# Altium PCB PCB1.PcbDoc
Units mm, origin at the board's own origin, x right, y up, seen from the top; angles counter-clockwise.
Board outline 40.75 x 21 mm, 2 copper layers (Top Layer, Bottom Layer), stack 1.071 mm thick; 24 components, 11 nets, 49 pads, 4 vias.
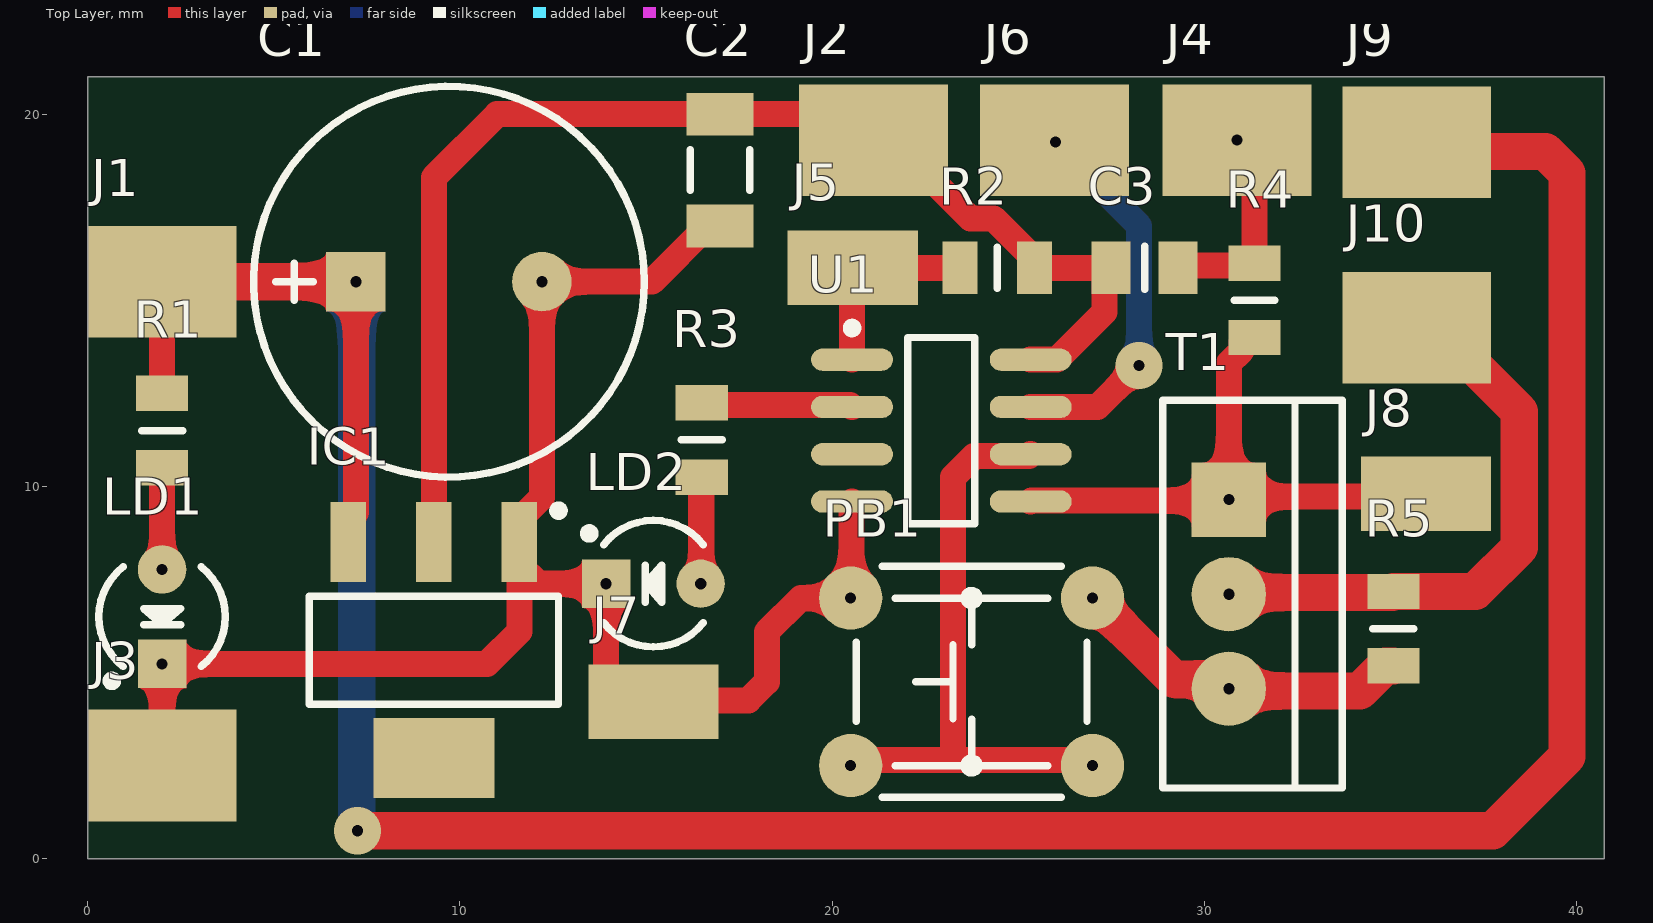
[diagram p0: Top Layer view]
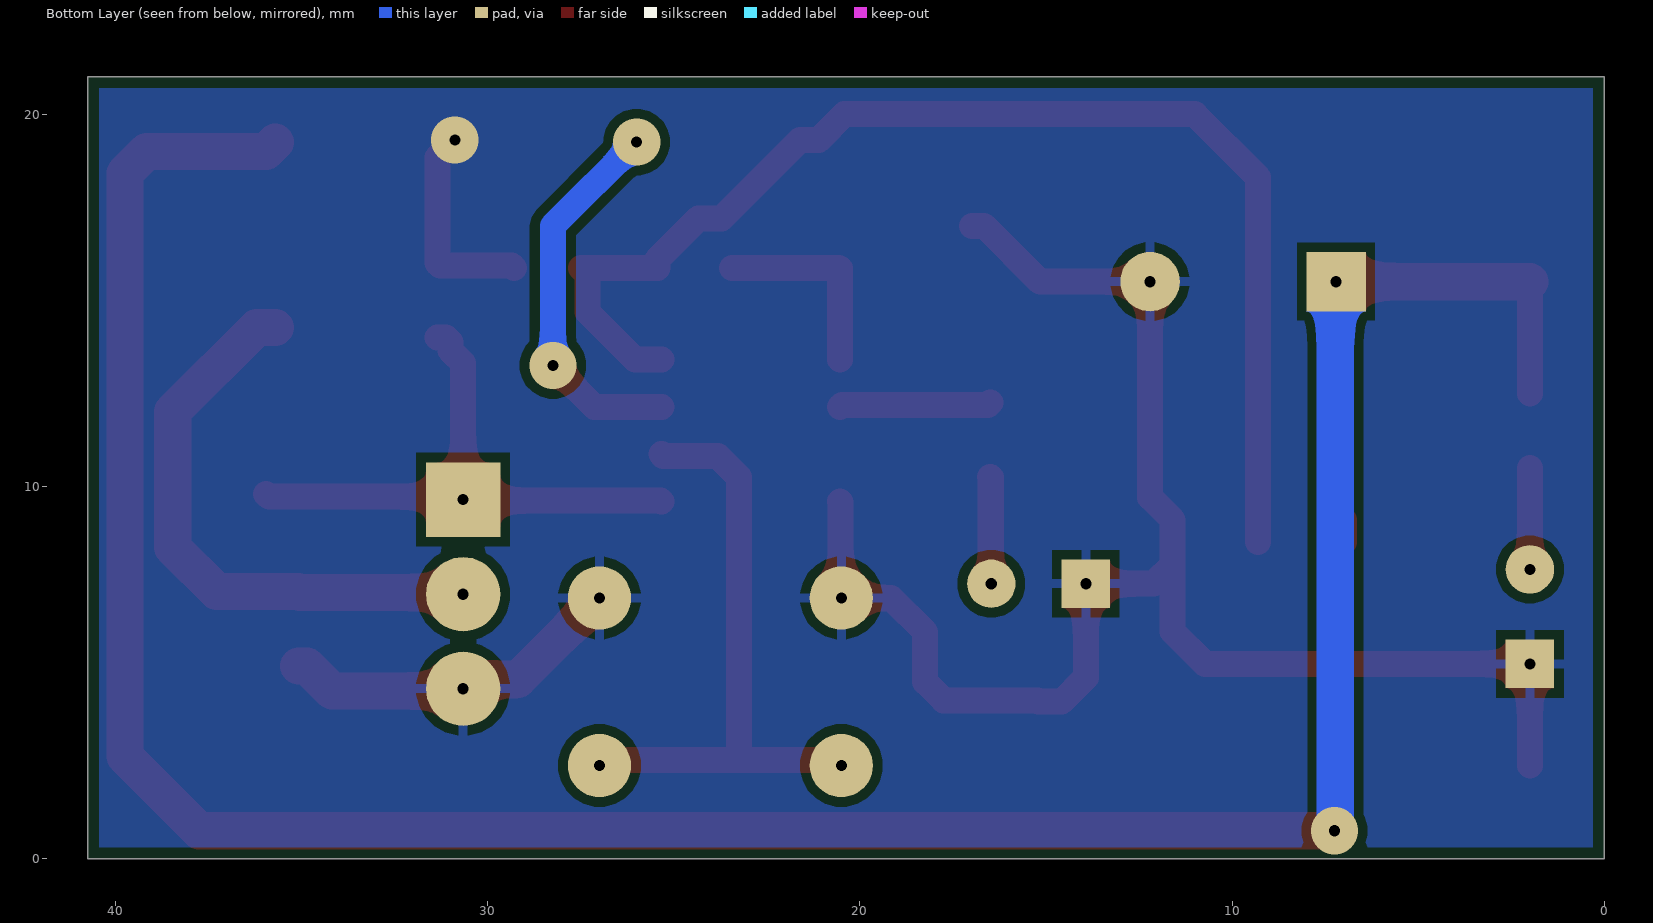
[diagram p1: Bottom Layer view, seen from below]
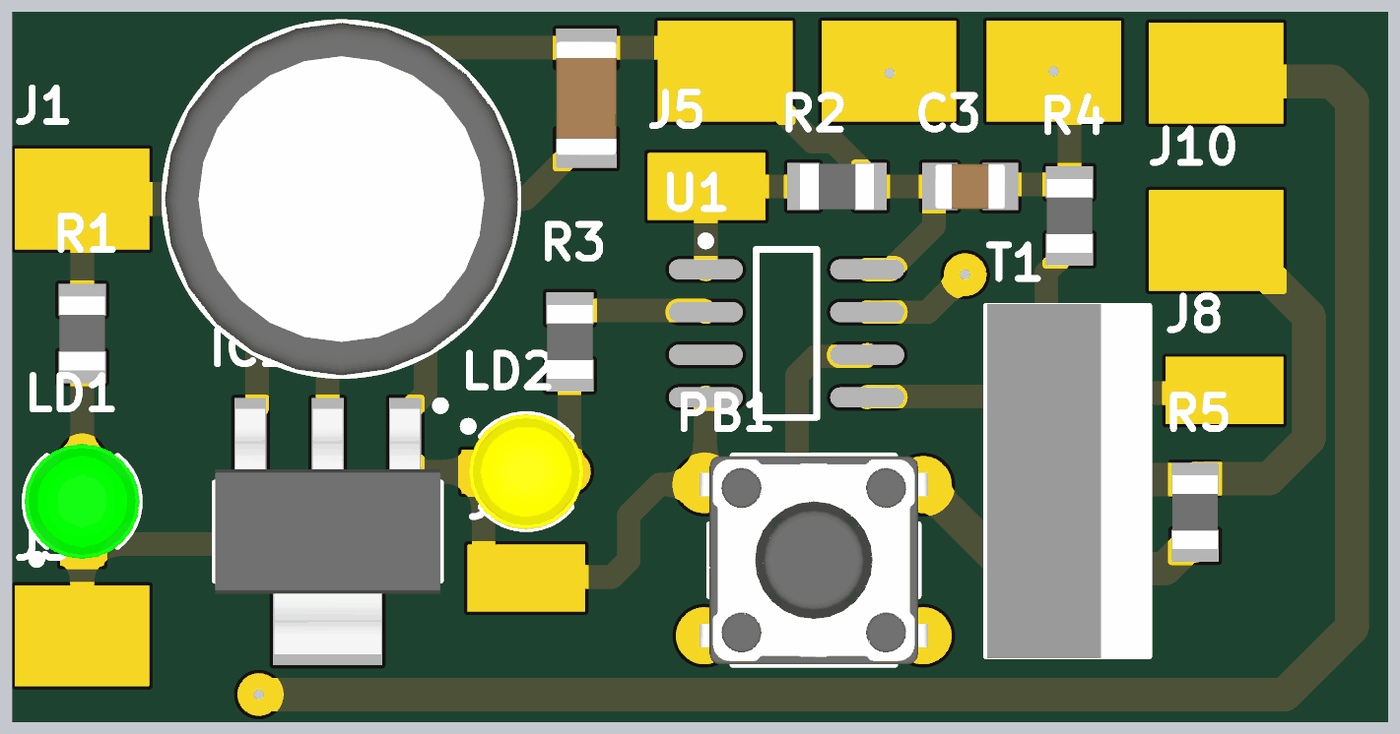
[diagram p2: 3D render of the assembled board from above, using the file's embedded part models]

## Layer stack, top to bottom
Top Solder: solder mask 0.0102, Solder Resist, Dk 3.5
Top Layer: signal copper 0.0356
Dielectric 1: dielectric 1, FR-4, Dk 4.8
Bottom Layer: signal copper 0.0356
Bottom Solder: solder mask 0.0102, Solder Resist, Dk 3.5

## Board outline
0,0 40.75,0 40.75,21 0,21

## Design rules (kind name [scope] priority, off if disabled: settings)
BoardOutlineClearance [All] p1: gap=0.3 ignorepadtopadclearanceinfootprint=FALSE
Clearance [All] p1: gap=0.254 ignorepadtopadclearanceinfootprint=FALSE except(0: Arc-Hole Track-Hole SMDPad-Hole THPad-Hole Via-Hole Fill-Hole Poly-Hole Region-Hole Text-Hole)
PolygonConnect PolygonConnect_1 [All vs IsNamedPolygon('GND_L02_P000')] p1: thpad.connectstyle=Relief thpad.reliefconductorwidth=0.254 thpad.reliefentries=4 thpad.polygonreliefangle="90 Angle" thpad.airgapwidth=0.254 smdpad.connectstyle=Relief smdpad.reliefconductorwidth=0.35 smdpad.reliefentries=4 smdpad.polygonreliefangle="90 Angle" smdpad.airgapwidth=0.254 via.connectstyle=Direct via.reliefconductorwidth=0.254 via.reliefentries=4 via.polygonreliefangle="90 Angle" via.airgapwidth=0.254
PolygonConnect [All] p2: connectstyle=Relief reliefconductorwidth=0.254 reliefentries=4 polygonreliefangle="90 Angle" airgapwidth=0.254
RoutingVias [All] p1: holewidth=0.711 width=1.27 viastyle="Through Hole" minholewidth=0.711 minwidth=1.27 maxholewidth=0.711 maxwidth=1.27
SolderMaskExpansion [All] p1: expansion=0.102 istentingtop=FALSE
Width [All] p1: maxlimit=1 minlimit=0.3 preferedwidth=0.7
30 further rules are at their usual default settings.

## Components (designator, comment, footprint, x,y, rotation, side; value= is the part's Value field where it differs from the comment)
C1 "470uF" CAPPR500-1050X1150 9.706,15.5 r0 top
C2 "100uF" CAPC3216X180N 16.987,18.5 r90 top
C3 "100nF" CAPC2012X135N 28.397,15.873 r180 top
IC1 "LM1117MP-2.5/NOPB" SOT230P700X180-4N 9.3,5.6 r270 top
J1 "SMD Pad" R400X300 2,15.5 r0 top
J2 "SMD Pad" R400X300 21.113,19.304 r0 top
J3 "SMD Pad" R400X300 2,2.5 r0 top
J4 "SMD Pad" R400X300 30.885,19.304 r0 top
J5 "SMD Pad" R350X200 20.559,15.873 r0 top
J6 "SMD Pad" R400X300 25.977,19.304 r0 top
J7 "SMD Pad" R350X200 15.201,4.215 r0 top
J8 "SMD Pad" R350X200 35.959,9.802 r0 top
J9 "SMD Pad" R400X300 35.709,19.248 r0 top
J10 "SMD Pad" R400X300 35.709,14.267 r0 top
LD1 "Green" LED_3MM_GREEN_1C-2A 2,6.5 r90 top
LD2 "Yellow" LED_3MM_YELLOW_1C-2A 15.201,7.386 r0 top
PB1 "Push Button" PB_ALPS_SKHHDTA010 23.75,4.75 r0 top
R1 "1k" RESC2012X60N 2,11.5 r90 top
R2 "1k" RESC2012X60N 24.44,15.873 r0 top
R3 "100" RESC2012X60N 16.5,11.25 r90 top
R4 "1k" RESC2012X60N 31.351,15 r270 top
R5 "10k" RESC2012X60N 35.083,6.177 r270 top
T1 "IRF3205" TO-220-V 30.661,7.104 r270 top
U1 "ATtiny13A-SSU" 8S1_N 22.938,11.5 r0 top

## Footprints (in the part's own frame and the unit in brackets; to place one, negate y for a bottom-side part, rotate by r counter-clockwise, add the part's x,y. Pads: shape width x height; smd on the part's side, far side on the other; paste and mask are expansions set on the pad)
8S1_N [mm] "SOIC, 8-Leads, Body 4.9x3.9mm, Pitch 1.27mm, IPC Medium Density"
  oval 2.2x0.6 smd: 1(-2.4,1.905) 2(-2.4,0.635) 3(-2.4,-0.635) 4(-2.4,-1.905) 5(2.4,-1.905) 6(2.4,-0.635) 7(2.4,0.635) 8(2.4,1.905)
  silkscreen extent -2.52,-2.5 0.9,2.88, body extent -2,-2.5 2,2.5, height 1.75
CAPC2012X135N [mm] "Chip Capacitor, Body 2.0x1.25mm, IPC Medium Density"
  rect 1.05x1.4 smd: 1(-0.9,0) 2(0.9,0)
  silkscreen extent 0,-0.58 0,0.58, body extent -1.05,-0.67 1.05,0.68, height 1.25
CAPC3216X180N [mm] "Chip Capacitor, Body 3.2x1.6mm, IPC Medium Density"
  rect 1.15x1.8 smd: 1(-1.5,0) 2(1.5,0)
  silkscreen extent -0.55,-0.8 0.55,0.8, body extent -1.7,-0.9 1.7,0.9, height 1.8
CAPPR500-1050X1150 [mm] "Capacitor, Radial, Pin spacing 5.0mm - Body Diameter 10.5mm X Body Height 11.5mm"
  rect 1.6x1.6 hole 0.3: 1(-2.5,0)
  round 1.6 hole 0.3: 2(2.5,0)
  silkscreen extent -5.25,-5.25 5.25,5.25, body extent -5.25,-5.23 5.25,5.23, height 11.5
LED_3MM_GREEN_1C-2A [mm] "LED, Green, Body Dia. 3.43 mm, Pin spacing 2.54mm"
  rect 1.3x1.3 hole 0.3: 1(-1.27,0)
  round 1.3 hole 0.3: 2(1.27,0)
  silkscreen extent -1.85,-1.7 1.34,1.7, body extent -1.71,-1.71 1.72,1.72, height 9.85
LED_3MM_YELLOW_1C-2A [mm] "LED, Red, Body Dia. 3.43 mm, Pin spacing 2.54mm"
  rect 1.3x1.3 hole 0.3: 1(-1.27,0)
  round 1.3 hole 0.3: 2(1.27,0)
  silkscreen extent -1.85,-1.7 1.34,1.7, body extent -1.71,-1.71 1.72,1.72, height 9.85
PB_ALPS_SKHHDTA010 [mm] "6x6mm Model, 13mm Stem Height Vertical Pushbutton Switch, ALPS SKHH Series"
  round 1.7 hole 0.3: 1(-3.25,2.25) 2(3.25,2.25) 3(-3.25,-2.25) 4(3.25,-2.25)
  silkscreen extent -3.1,-3.1 3.1,3.1, body extent -3.95,-3.1 3.95,3.1, height 13
R350X200 [mm] "3.5mm x  2mm SMD Pad"
  rect 3.5x2 smd paste-1: 1(0,0)
R400X300 [mm] "4mm x  3mm SMD Pad"
  rect 4x3 smd paste-1.5: 1(0,0)
RESC2012X60N [mm] "Chip Resistor, EIA 0805, Metric 2012, Body 2.0x1.2mm, IPC Medium Density"
  rect 0.95x1.4 smd: 1(-1,0) 2(1,0)
  silkscreen extent 0,-0.55 0,0.55, body extent -1.1,-0.67 1.1,0.68, height 0.6
SOT230P700X180-4N [mm] "SOT223, 2.30mm pitch; 3 pin, 3.70mm W X 6.70mm L, IPC Medium Density"
  rect 2.15x0.95 smd: 1(-2.9,2.3) 2(-2.9,0) 3(-2.9,-2.3)
  rect 2.15x3.25 smd: 4(2.9,0)
  silkscreen extent -3.87,-3.35 1.45,3.48, body extent -3.65,-3.35 3.65,3.35, height 1.81
TO-220-V [mm] "TO-220 3-Terminal - Vertical Mount"
  rect 2x2 hole 0.3: 1(-2.54,0)
  round 2 hole 0.3: 2(0,0) 3(2.54,0)
  silkscreen extent -5.21,-1.78 5.21,3.05, body extent -5.27,-1.75 5.27,2.95, height 20.5

## Part data
C1: library part CAER_470UF_10V_20%_500-1050X1150_LESR0R015, "Polarised capacitor", Case="LS5 D10.5 x H11.5", Manufacturer="SANYO OS-CON", Manufacturer Part Number=10SP470M, Tolerance=±20%, Voltage=10V, Author="CERN DEM JLC", Component Type=Standard, ComponentHeight=11.5mm, CreateDate=29.01.2008, HelpURL=\\cern.ch\dfs\Applications\Altium\Datasheets\CAER-LESR_SANYO_SP.pdf, LatestRevisionDate=16.03.2009, Mounted=Yes, Part Description="Low ESR 0R015 Aluminum Solid Capacitor With Organic Semiconductive Electrolyte", Part Number=CAER_470UF_10V_20%_500-1050X1150_LESR0R015, Pin Count=2, Sense=No, SMD=No, Socket=No, Status=Obsolete
C2: library part CC1206_100UF_6.3V_20%_X5R, "Non-polarised capacitor", Case=1206, Manufacturer=GENERIC, Manufacturer1 ComponentHeight=1.8mm, Manufacturer1 Example=KEMET, Manufacturer1 Part Number=C1206C107M9PACTU, Tolerance=±10%, Voltage=6.3V, Author="CERN DEM JLC", Component Type=Standard, CreateDate=26.09.2012, HelpURL=\\cern.ch\dfs\Applications\Altium\Datasheets\CC1206_X5R_KEMET.pdf, LatestRevisionDate=26.09.2012, Manufacturer Part Number=CC1206_100UF_6.3V_20%_X5R, Mounted=Yes, Part Description="SMD Multilayer Chip Ceramic Capacitor", Part Number=CC1206_100UF_6.3V_20%_X5R, Pin Count=2, Sense=No, SMD=Yes, Socket=No, Status=None, TC=X5R
C3: library part CC0805_100NF_50V_10%_X7R, "Non-polarised capacitor", Case=0805, Manufacturer=GENERIC, Manufacturer1 ComponentHeight=1mm, Manufacturer1 Example=TDK, Manufacturer1 Part Number=C2012X7R1H104K085AA, Tolerance=±10%, Voltage=50V, Author="CERN DEM JLC", Component Type=Standard, CreateDate=03.12.2007, HelpURL=\\cern.ch\dfs\Applications\Altium\Datasheets\CC0805_X7R_TDK_C.pdf, LatestRevisionDate=22.04.2015, Manufacturer Part Number=CC0805_100NF_50V_10%_X7R, Mounted=Yes, Part Description="SMD Multilayer Chip Ceramic Capacitor", Part Number=CC0805_100NF_50V_10%_X7R, Pin Count=2, Sense=No, SMD=Yes, Socket=No, Status=Preferred, TC=X7R
IC1: "3-Terminal Regulator 1=GND 2=OUT 3=IN 4=OUT", Case=SOT223, Manufacturer="TEXAS INSTRUMENTS", Author="CERN DEM JLC", Bonding=No, Component Type=Standard, ComponentHeight=1.8mm, CreateDate=23.02.2015, Device=LM1117MP-2.5/NOPB, HelpURL=\\cern.ch\dfs\Applications\Altium\Datasheets\LM1117MP-2.5-NOPB.pdf, LatestRevisionDate=23.02.2015, Manufacturer Part Number=LM1117MP-2.5/NOPB, Mounted=Yes, PackageDescription="SOT223, 2.30mm pitch; 3 pin, 3.70mm W X 6.70mm L, IPC Medium Density", Part Description="2.5V 800mA Low-Dropout Linear Regulator", Part Number=LM1117MP-2.5/NOPB, Pin Count=4, PressFit=No, Sense=No, SMD=Yes, Socket=No
J1 J2 J3 J4 J6 J9 J10: library part SMD_PAD_4X3MM, "Single SMD Pad", Author="CERN DEM JLC", Component Type="Standard (No BOM)", ComponentHeight=0mm, CreateDate=15.03.2010, Family="SMD Pad", HelpURL=Undefined, LatestRevisionDate=15.03.2010, Mounted=No, PackageDescription="4mm x  3mm SMD Pad", Part Description="4mm x 3mm SMD Pad", Part Number=SMD_PAD_4X3MM, Pin Count=1, Sense=No, SMD=No, Socket=No, Status=None
J5 J7 J8: library part SMD_PAD_3.5X2MM, "Single SMD Pad", Author="CERN DEM JLC", Component Type="Standard (No BOM)", ComponentHeight=0mm, CreateDate=15.03.2010, Family="SMD Pad", HelpURL=Undefined, LatestRevisionDate=15.03.2010, Mounted=No, PackageDescription="3.5mm x  2mm SMD Pad", Part Description="3.5mm x 2mm SMD Pad", Part Number=SMD_PAD_3.5X2MM, Pin Count=1, Sense=No, SMD=No, Socket=No, Status=None
LD1: library part LED_AVAGO_HLMP-1790, "LED Green 1C 2A", Manufacturer="AVAGO TECHNOLOGIES", Manufacturer Part Number=HLMP-1790, Author="CERN DEM JLC", Bonding=No, Color=Green, Component Type=Standard, ComponentHeight=6.35mm(min), CreateDate=12.06.2008, HelpURL=\\cern.ch\dfs\Applications\Altium\Datasheets\LED_AVAGO_HLMP-1790.pdf, LatestRevisionDate=17.03.2010, Mounted=Yes, PackageDescription="LED, Green, Body Dia. 3.43 mm, Pin spacing 2.54mm", Part Description="3mm Green LED", Part Number=LED_AVAGO_HLMP-1790, Pin Count=2, PressFit=No, Sense=No, SMD=No, Socket=No
LD2: library part LED_AVAGO_HLMP-1719, "LED Yellow 1C 2A", Manufacturer="AVAGO TECHNOLOGIES", Manufacturer Part Number=HLMP-1719, Author="CERN DEM JLC", Bonding=No, Color=Yellow, Component Type=Standard, ComponentHeight=6.35mm(min), CreateDate=12.06.2008, HelpURL=\\cern.ch\dfs\Applications\Altium\Datasheets\LED_AVAGO_HLMP-1719.pdf, LatestRevisionDate=17.03.2010, Mounted=Yes, PackageDescription="LED, Yellow, Body Dia. 3.43 mm, Pin spacing 2.54mm", Part Description="3mm Yellow LED", Part Number=LED_AVAGO_HLMP-1719, Pin Count=2, PressFit=No, Sense=No, SMD=No, Socket=No
PB1: library part PB_ALPS_SKHHDTA010, "Push-Button Switch SPDT", Manufacturer=ALPS, Manufacturer Part Number=SKHHDTA010, Author="CERN DEM JLC", Component Type=Standard, ComponentHeight=13mm, CreateDate=26.09.2013, Family="Push Button", HelpURL=\\cern.ch\dfs\Applications\Altium\Datasheets\PB_ALPS_SKHHDTA010.pdf, LatestRevisionDate=26.09.2013, Mounted=Yes, PackageDescription="6x6mm Model, 13mm Stem Height Vertical Pushbutton Switch, ALPS SKHH Series", Part Description="12VDC 50mA, 6x6mm Model, 13mm Stem Height Vertical Pushbutton Switch, ALPS SKHH Series", Part Number=PB_ALPS_SKHHDTA010, Pin Count=4, PressFit=No, Sense=No, SMD=No, Socket=No, Status=None
R1 R2 R4: library part R0805_1K_1%_0.33W_100PPM_VISHAY_CRCW-HP, "Resistor - 1%", Case=0805, Manufacturer="VISHAY DRALORIC", Manufacturer1 ComponentHeight=0.6mm, Manufacturer Part Number=CRCW08051K00FKEAHP, Power=0.33W, Tolerance=±1%, Author="CERN DEM JLC", Component Type=Standard, CreateDate=16.06.2010, HelpURL="\\cern.ch\dfs\Applications\Altium\Datasheets\R0805_VISHAY_CRCW-HP e3.pdf", LatestRevisionDate=16.06.2010, Mounted=Yes, Part Description="150V, Pulse Proof, High Power Thick Film Chip Resistor", Part Number=R0805_1K_1%_0.33W_100PPM_VISHAY_CRCW-HP, Pin Count=2, PressFit=No, Sense=No, SMD=Yes, Socket=No, Status=None, TC=±100ppm/°C
R3: library part R0805_100R_1%_0.125W_100PPM, "Resistor - 1%", Case=0805, Manufacturer=GENERIC, Manufacturer1 ComponentHeight=0.6mm, Manufacturer1 Example="NIC COMPONENT", Manufacturer1 Part Number=NRC10F4700TRF, Power=0.125W, Tolerance=±1%, Author="CERN DEM JLC", Component Type=Standard, CreateDate=03.12.2007, HelpURL=\\cern.ch\dfs\Applications\Altium\Datasheets\R0805_NIC_NRC.pdf, LatestRevisionDate=13.03.2008, Manufacturer Part Number=R0805_100R_1%_0.125W_100PPM, Mounted=Yes, Part Description="General Purpose Thick Film Chip Resistor", Part Number=R0805_100R_1%_0.125W_100PPM, Pin Count=2, PressFit=No, Sense=No, SMD=Yes, Socket=No, Status=Preferred, TC=±100ppm/°C
R5: library part R0805_10K_1%_0.125W_100PPM, "Resistor - 1%", Case=0805, Manufacturer=GENERIC, Manufacturer1 ComponentHeight=0.6mm, Manufacturer1 Example="NIC COMPONENT", Manufacturer1 Part Number=NRC10F1002TRF, Power=0.125W, Tolerance=±1%, Author="CERN DEM JLC", Component Type=Standard, CreateDate=03.12.2007, HelpURL=\\cern.ch\dfs\Applications\Altium\Datasheets\R0805_NIC_NRC.pdf, LatestRevisionDate=13.03.2008, Manufacturer Part Number=R0805_10K_1%_0.125W_100PPM, Mounted=Yes, Part Description="General Purpose Thick Film Chip Resistor", Part Number=R0805_10K_1%_0.125W_100PPM, Pin Count=2, PressFit=No, Sense=No, SMD=Yes, Socket=No, Status=Preferred, TC=±100ppm/°C
T1: library part IRF640NPBF_v, "N-CHANNEL MOSFET WITH ZENER DIODE", Case=TO-220, Manufacturer="INTERNATIONAL RECTIFIER", Manufacturer Part Number=IRF640NPBF, Author="CERN DEM JLC", Bonding=No, Component Type=Standard, ComponentHeight=19.3mm, CreateDate=16.01.2012, Device=IRF640NPBF, HelpURL=\\cern.ch\dfs\Applications\Altium\Datasheets\IRF640NPBF.pdf, LatestRevisionDate=16.01.2012, Mounted=Yes, PackageDescription="TO-220 3-Terminal - Vertical", Part Description="200V 18A N-Channel HEXFET® Power MOSFET", Part Number=IRF640NPBF_v, Pin Count=3, PressFit=No, Sense=No, SMD=No, Socket=No
U1: "8-bit AVR Microcontroller, 1.8-5.5V, 1KB Flash, 64 Bytes EEPROM, 64 Bytes SRAM, 8-pin SOIC, Industrial Grade (-40°C to 85°C), Pb-Free", Supplier Part Number 1=ATTINY13A-SSU-ND, Code_IPC=SOIC127P600-8, Code_JEDEC=MS-012-AA, ComponentLink1Description="Manufacturer Link", ComponentLink1URL=http://www.atmel.com/products/avr/default.asp?, ComponentLink2Description="ATtiny13A Datasheet", ComponentLink2URL=http://www.atmel.com/dyn/resources/prod_documents/doc8126.pdf, ComponentLink3Description="ATtiny13A Summary", ComponentLink3URL=http://www.atmel.com/dyn/resources/prod_documents/8126S.pdf, ComponentLink4Description="Atmel.com Home", ComponentLink4URL=http://www.atmel.com, DatasheetVersion="revD, Nov-2009", PackageDescription="8-Lead (0.150\" Wide Body), Plastic Gull Wing Small Outline (JEDEC SOIC)", PackageReference=8S1, PackageVersion="revC, Mar-2005", Published=1-Apr-2010, Publisher="Altium Limited", Supplier 1=Digi-Key, Supplier 2=Farnell, Supplier 3=Mouser, Supplier Part Number 2=1704567, Supplier Part Number 3=556-ATTINY13A-SSU

## Via types
v1: diameter 1.27, hole 0.3, Top Layer to Bottom Layer, 4 vias

## Nets (pads, with @x,y where several pads share a name; then routed paths per layer and width w, separated by ;. In a path a pad name is that pad's centre, name@x,y a point inside that pad or via, vN(x,y) a via of type N, cw(c..) or ccw(c..) an arc to the next point about the centre after c; other vN are vias at no path point)
+5: C2.2 C3.2 IC1.2 J2.1 R2.2 U1.8 | length 34.3
  Top Layer w0.7: IC1.2 9.3,18.3 11,20 C2.2 20.417,20 J2.1 21.613,19.304 23.717,17.2 24.338,17.2 25.44,16.098 R2.2 C3.2 27.322,15.698 27.322,14.689 26.038,13.405 U1.8
+12: C1.1 IC1.3 J1.1 J9.1 R1.2 | length 83.4
  Top Layer w0.7: R1.2 J1.1 ; IC1.3 7,9.1 7.206,9.306 C1.1
  Top Layer w1: J1.1 C1.1 ; v1(7.25,0.75) 37.75,0.75 39.75,2.75 39.75,18.414 39.164,19 35.958,19 J9.1
  Bottom Layer w1: C1.1 7.228,15.478 7.228,0.772 v1(7.25,0.75)
GND: C1.2 C2.1 C3.1 IC1.1 J3.1 J4.1 J7.1 LD1.1 LD2.1 PB1.1 PB1.2 R4.1 R5.2 T1.3 U1.4 | length 59.2
  Top Layer w0.7: J3.1 LD1.1 10.73,5.23 11.6,6.1 IC1.1@11.6,7.9 ; C2.1 16.662,17 15.162,15.5 C1.2 12.206,9.706 11.6,9.1 IC1.1 IC1.1@11.6,7.9 ; U1.4 20.519,9.576 20.519,7.019 PB1.1 19.16,7 18.25,6.09 18.25,4.75 17.75,4.25 15.235,4.25 J7.1 14.581,4.215 13.931,4.865 LD2.1 12.114,7.386 IC1.1@11.6,7.9 ; C3.1 29.36,15.937 31.288,15.937 R4.1 31.351,18.837 v1(30.885,19.304)
  Top Layer w1: PB1.2 29.187,4.813 30.412,4.813 T1.3 30.725,4.5 34.181,4.5 34.858,5.177 R5.2
NetJ5_1: J5.1 R2.1 U1.1 | length 5.4
  Top Layer w0.7: U1.1 20.538,15.853 J5.1 R2.1
NetJ6_1: J6.1 U1.7 | length 10.3
  Top Layer w0.7: U1.7 27.135,12.135 v1(28.25,13.25)
  Bottom Layer w0.7: v1(26,19.25) 28.25,17 v1(28.25,13.25)
NetJ8_1: J8.1 R4.2 T1.1 U1.5 | length 15.5
  Top Layer w0.7: U1.5 25.363,9.62 30.636,9.62 T1.1 ; R4.2 31.126,14 31.001,13.875 31.001,13.65 30.661,13.31 T1.1 ; J8.1 35.88,9.723 30.74,9.723 T1.1
NetJ10_1: J10.1 R5.1 T1.2 | length 15.7
  Top Layer w1: T1.2 30.709,7.152 35.058,7.152 R5.1 37.283,7.177 38.463,8.357 38.463,12.013 36.209,14.267 J10.1
NetLD1_2: LD1.2 R1.1 | length 2.7
  Top Layer w0.7: LD1.2 R1.1
NetLD2_2: LD2.2 R3.1 | length 2.9
  Top Layer w0.7: LD2.2 16.485,7.4 16.485,10.235 R3.1
NetPB1_3: PB1.3 PB1.4 U1.6 | length 16.6
  Top Layer w0.7: PB1.3 20.65,2.65 23.25,2.65 ; U1.6 25.288,10.815 23.815,10.815 23.25,10.25 23.25,2.65 ; PB1.4 26.85,2.65 23.25,2.65
NetR3_2: R3.2 U1.2 | length 4.1
  Top Layer w0.7: R3.2 16.565,12.185 20.488,12.185 U1.2
pads on no net: IC1.4 U1.3

## Polygon pours and split planes (outlines as drawn)
GND on Bottom Layer "GND_L02_P000" (solid, remove dead copper, pour order 0): 0,0 40.75,0 40.75,21 0,21

## Silkscreen, mask and mechanical layers (free items; w line width, h text height)
Board:
  the board outline again, w0.15